# Altium PCB UC-523.PcbDoc (part 1 of 2)
Units mil, origin at the board's own origin, x right, y up, seen from the top; angles counter-clockwise.
Board outline 3149.61 x 3149.61 mil, 2 copper layers (Top Layer, Bottom Layer); 795 components, 348 nets, 3091 pads, 29 vias.
Unrouted connection lines stored in the file: 1727.
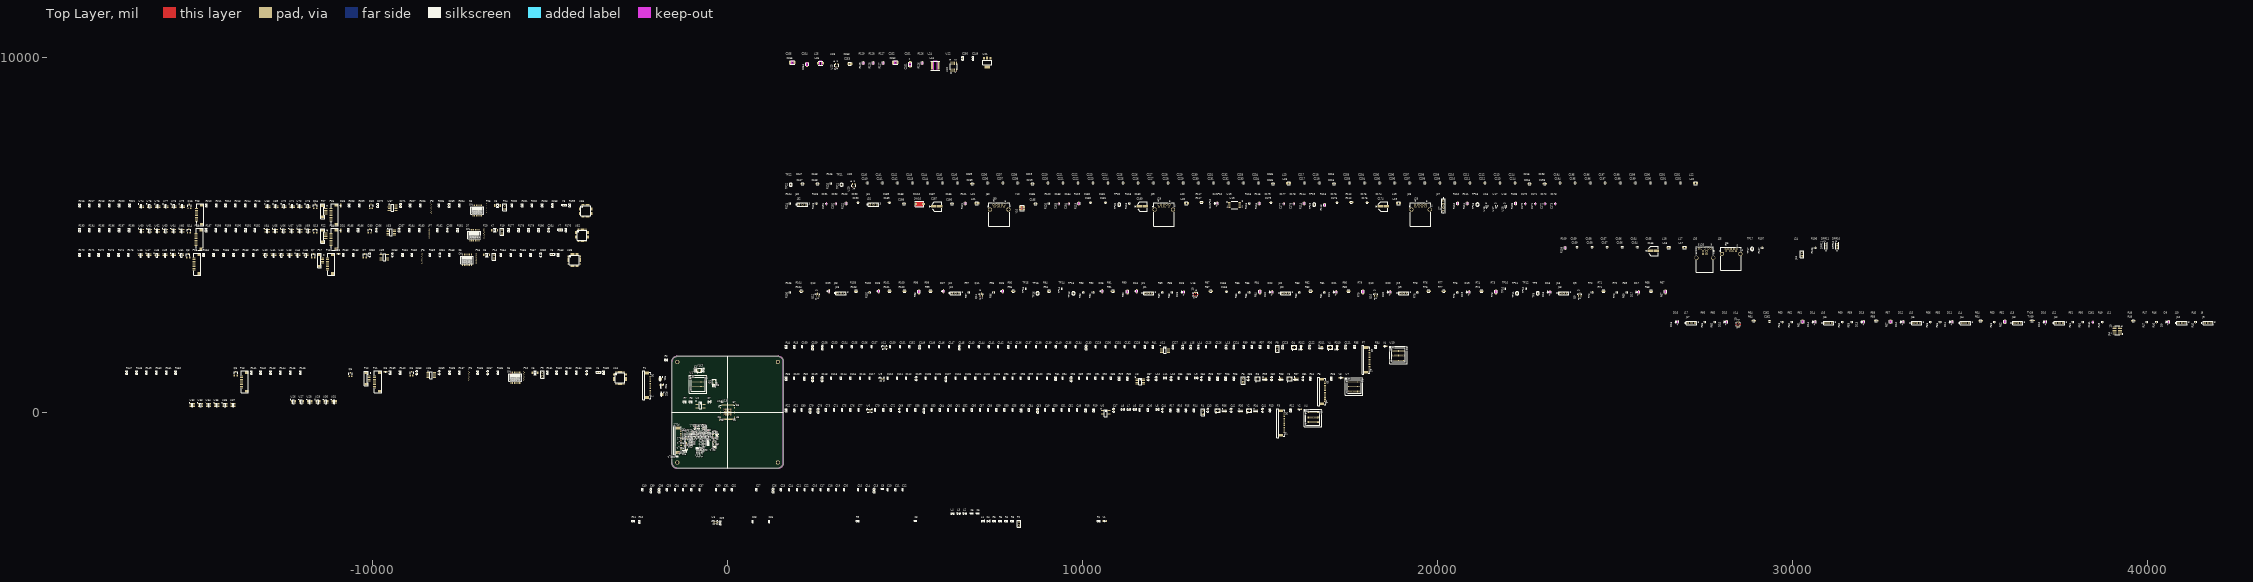
[diagram p0: Top Layer view]
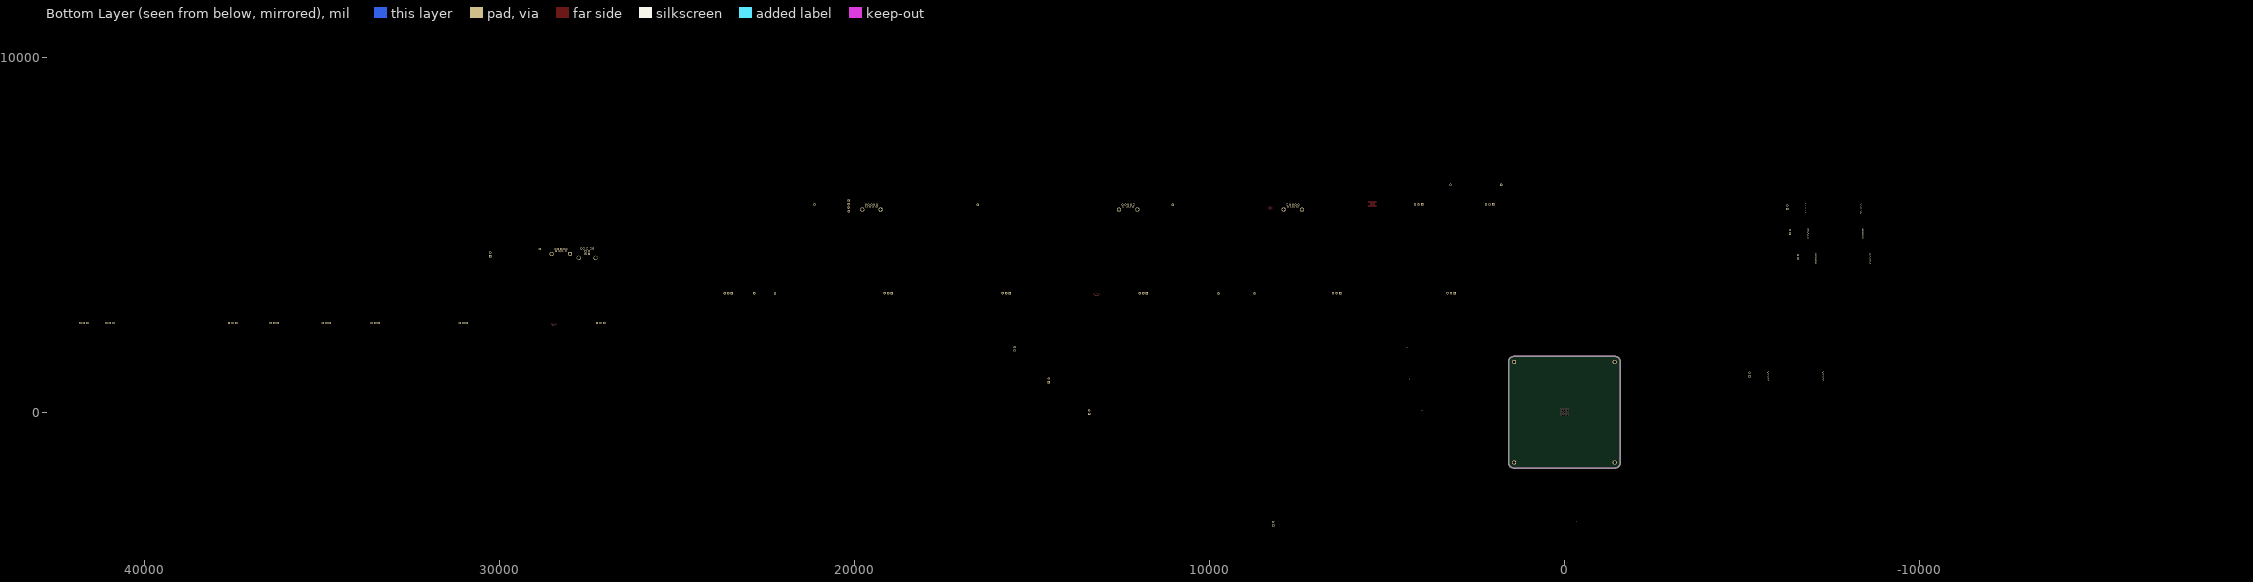
[diagram p1: Bottom Layer view, seen from below]

## Layer stack, top to bottom
Top Layer: signal copper 1.4
Dielectric: dielectric 12.6, FR-4, Dk 4.8
Bottom Layer: signal copper 1.4

## Board outline
-1574.8,-1417.32 -1574.8,1417.32 cw(c-1417.32,1417.32) -1417.32,1574.8 1417.32,1574.8 cw(c1417.32,1417.32) 1574.8,1417.32 1574.8,-1417.32 cw(c1417.32,-1417.32) 1417.32,-1574.8 -1417.32,-1574.8 cw(c-1417.32,-1417.32)

## Design rules (kind name [scope] priority, off if disabled: settings)
Clearance [All] p1: gap=7
DiffPairsRouting [All] p1: maxlimit=10 minlimit=10 mostfreqgap=10 maxuncoupledlength=500
PolygonConnect [All] p1: connectstyle=Relief reliefconductorwidth=10 reliefentries=4 polygonreliefangle="90 Angle"
RoutingVias [All] p1: holewidth=28 width=50 viastyle="Through Hole" minholewidth=28 minwidth=50 maxholewidth=28 maxwidth=50
SilkscreenOverComponentPads [All] p1: minsilkscreentomaskgap=10
SolderMaskExpansion [All] p1: expansion=4
Width [All] p1: maxlimit=10 minlimit=10 preferedwidth=10
26 further rules are at their usual default settings.

## Classes and differential pairs
component class "LED_Driver - 4": C256 C257 C258 C259 C268 C269 C270 C271 D28 D29 D32 D33 JP4 JP8 K4 K8 P24 P25 P26 P27 P28 Q11 Q12 Q15 Q16 R187 R188 R189 R190 R191 R192 R193 R194 R195 R196 R197 R198 R199 R200 R201 R202 R203 R204 R205 R206 R207 R208 R209 R210 R211 R212 R213 R214 R215 R216 R217 R218 R219 R220 R221 S4 S8 U66 U67 U68 U69 U70 U71 U72 U73 U74 U75 U76 U77 U78 U79 Y8 Y9
component class "LED_Driver - 3": C252 C253 C254 C255 C264 C265 C266 C267 D26 D27 D30 D31 JP3 JP7 K3 K7 P19 P20 P21 P22 P23 Q9 Q10 Q13 Q14 R164 R165 R166 R167 R168 R169 R170 R171 R172 R173 R174 R175 R176 R177 R178 R179 R180 R181 R182 R183 R184 R185 R186 R187 R188 R189 R190 R191 R192 R193 R194 R195 R196 R197 R198 S3 S7 U52 U53 U54 U55 U56 U57 U58 U59 U60 U61 U62 U63 U64 U65 Y7 Y8
component class "LED_Driver - 2": C248 C249 C250 C251 C260 C261 C262 C263 D7 D8 D24 D25 JP2 JP6 K2 K6 P14 P15 P16 P17 P18 Q7 Q8 R141 R142 R143 R144 R145 R146 R147 R148 R149 R150 R151 R152 R153 R154 R155 R156 R157 R158 R159 R160 R161 R162 R163 R164 R165 R166 R167 R168 R169 R170 R171 R172 R173 R174 R175 S2 S6 U38 U39 U40 U41 U42 U43 U44 U45 U46 U47 U48 U49 U50 U51 Y6 Y7
component class "LED_Driver - 1": C244 C245 C246 C247 C256 C257 C258 C259 D5 D6 D22 D23 JP1 JP5 K1 K5 P9 P10 P11 P12 P13 Q5 Q6 R118 R119 R120 R121 R122 R123 R124 R125 R126 R127 R128 R129 R130 R131 R132 R133 R134 R135 R136 R137 R138 R139 R140 R141 R142 R143 R144 R145 R146 R147 R148 R149 R150 R151 R152 S1 S5 U24 U25 U26 U27 U28 U29 U30 U31 U32 U33 U34 U35 U36 U37 Y5 Y6
component class "Cyusb3014 - 1": C1 C2 C3 C4 C5 C6 C7 C8 C9 C10 C11 C12 C13 C14 C15 C16 C17 C18 C19 C20 C21 C22 C23 C24 C25 C26 C27 C28 C29 C30 C31 C32 C33 C34 C35 C36 C37 C38 C39 C40 G1 L1 L2 L3 L4 P1 P2 R1 R2 R3 R4 R5 R6 R7 R8 R9 R10 R11 RS1 RS2 RS3 U1 U2 U3 V1 Y1
component class "Cyusb3014 - 2": C38 C39 C40 C41 C42 C43 C44 C45 C46 C47 C48 C49 C50 C51 C52 C53 C54 C55 C56 C57 C58 C59 C60 C61 C62 C63 C64 C65 C66 C67 C68 C69 C70 C71 C72 C73 C74 C75 C76 C77 C78 C79 C80 G2 L5 L6 L7 L8 P3 P4 R9 R10 R11 R12 R13 R14 R15 R16 R17 R18 R19 R20 R21 R22 RS4 RS5 RS6 U4 U5 U6 V2 Y2
component class "Cyusb3014 - 3": C75 C76 C77 C78 C79 C80 C81 C82 C83 C84 C85 C86 C87 C88 C89 C90 C91 C92 C93 C94 C95 C96 C97 C98 C99 C100 C101 C102 C103 C104 C105 C106 C107 C108 C109 C110 C111 C112 C113 C114 C115 C116 C117 C118 C119 C120 G3 L9 L10 L11 L12 P5 P6 R17 R18 R19 R20 R21 R22 R23 R24 R25 R26 R27 R28 R29 R30 R31 R32 R33 RS7 RS8 RS9 U7 U8 U9 V3 Y3
component class "Cyusb3014 - 4": C112 C113 C114 C115 C116 C117 C118 C119 C120 C121 C122 C123 C124 C125 C126 C127 C128 C129 C130 C131 C132 C133 C134 C135 C136 C137 C138 C139 C140 C141 C142 C143 C144 C145 C146 C147 C148 C149 C150 C151 C152 C153 C154 C155 C156 C157 C158 C159 C160 G4 L13 L14 L15 L16 P7 P8 R25 R26 R27 R28 R29 R30 R31 R32 R34 R35 R36 R37 R38 R39 R40 R41 R42 R43 R44 RS10 RS11 RS12 U10 U11 U12 V4 Y4
component class Cyusb3314_Indicator: C149 C150 C151 C161 C162 C163 D1 D2 D3 D4 D5 D6 D7 D8 D9 D10 D11 D12 D13 D14 D15 D16 D17 D18 D19 D20 D21 D22 D23 D24 D25 D26 D27 D28 D29 J1 J2 J3 J4 J5 J6 J7 J8 J9 J10 J11 J12 J13 J14 J15 J16 J17 J18 J19 J20 J21 J22 J23 Q1 Q2 Q3 Q4 Q9 Q10 Q11 Q12 R33 R34 R35 R36 R37 R38 R39 R40 R41 R42 R43 R44 R45 R46 R47 R48 R49 R50 R51 R52 R53 R54 R55 R56 R57 R58 R59 R60 R61 R62 R63 R64 R65 R66 R67 R68 R69 R70 R71 R72 R73 R74 R75 R76 R77 R78 R79 R80 R81 R82 R83 R84 R85 R86 R87 R88 R89 R90 R91 R92 R93 R94 R95 R96 R97 R98 R99 R100 R101 R102 R103 R104 R105 TP1 TP2 TP3 TP4 TP5 TP6 TP7 TP8 TP9 TP10 TP11 TP12 TP13 TP14 TP15 TP16 TVS1 TVS9 U14 U15
component class Cyusb3314_Interface: C152 C153 C154 C155 C156 C157 C158 C159 C160 C161 C162 C163 C164 C165 C166 C167 C168 C169 C170 C171 C172 C173 C174 C175 C176 C177 C178 C179 C180 C181 C182 C183 C184 C185 C186 C187 C188 C189 C190 C191 C192 DPR1 DPR2 DPR10 DPR11 J16 J17 J18 J19 J20 J21 J22 J23 J24 J25 J26 J27 J28 J29 J30 J31 J32 L17 L18 L19 L20 L21 R94 R95 R96 R97 R98 R99 R100 R101 R102 R103 R104 R105 R106 R107 R108 R109 R110 R111 R112 R113 R114 R115 R116 R117 R118 R119 R120 R121 R122 R123 R124 SUSP1 SUSP10 SW1 SW10 TP9 TP10 TP11 TP12 TP17 TP18 TP19 TP20 U13 U16 U17 U18 U19 U25 Y5 Y10
component class Cyusb3314_Power: C181 C182 C183 C184 C185 C186 C187 C188 C189 C190 C191 C192 C193 C194 C195 C196 C197 C198 C199 C200 C201 C202 C203 C204 C205 C206 C207 C208 C209 C210 C211 C212 C213 C214 C215 C216 C217 C218 C219 C220 C221 C222 C223 C224 C225 C226 C227 C228 C229 C230 C231 C232 C233 C234 C235 C236 C237 C238 C239 C240 C241 C242 C243 C244 C245 C246 C247 C248 L22 L23 R113 R125 TP13 TP14 TP21 TP22 U20 U32
component class Power: C237 C238 C239 C240 C241 C242 C243 C249 C250 C251 C252 C253 C254 C255 C256 C257 C258 C259 L24 L25 R114 R115 R116 R117 R126 R127 R128 R129 R206 R207 R208 R209 U21 U22 U23 U89 U90 U91
differential pair SST: +SST_P -SST_N

## Components (designator, comment, footprint, x,y, rotation, side; value= is the part's Value field where it differs from the comment)
C1 "12pF" 0603S-CAP -677,1187.41 r90 top
C1_1 "12pF" 0603S-CAP -282.4,-658.4 r270 top (schematic designator C1)
C2 "12pF" 0603S-CAP -913,1189.59 r270 top
C2_1 "12pF" 0603S-CAP -374.4,-543.4 r180 top (schematic designator C2)
C3 "0.1u" 0603S-CAP -379.59,745 r0 top
C3_1 "0.1u" 0603S-CAP -369.4,-988.4 r0 top (schematic designator C3)
C4 "0.1u" 0603S-CAP 7350,-3065 r0 top
C5 "0.1u" C0402 6879,-2847 r0 top
C6 "0.01u" C0402 7049,-2847 r0 top
C7 "0.1uF" 0603S-CAP -511,298 r0 top
C8 "0.1u" C0402 5300,-3055 r0 top
C9 "0.01u" C0402 4363,-2159 r0 top
C9_1 "0.1u" C0402 -833.4,-601.4 r180 top (schematic designator C9)
C10 "0.01u" C0402 4513,-2179 r90 top
C10_1 "0.01u" C0402 -833.4,-645.4 r180 top (schematic designator C10)
C11 "0.01u" C0402 4733,-2179 r90 top
C12 "0.01u" C0402 4933,-2179 r90 top
C13 "2.2u" C0805S-CAP 4133,-2209 r90 top
C14 "0.1u" C0402 3903,-2179 r90 top
C15 "0.01u" C0402 3683,-2179 r90 top
C15_1 "0.1u" C0402 -551.4,-790.9 r0 top (schematic designator C15)
C16 "0.01u" C0402 2403,-2179 r90 top
C16_1 "0.01u" C0402 -1024.4,-688.73 r180 top (schematic designator C16)
C17 "0.01u" C0402 2623,-2179 r90 top
C17_1 "0.1u" C0402 -1024.4,-872.07 r180 top (schematic designator C17)
C18 "0.01u" C0402 2843,-2179 r90 top
C18_1 "0.01u" C0402 -507.4,-645.4 r0 top (schematic designator C18)
C19 "0.01u" C0402 3063,-2179 r90 top
C19_1 "0.1u" C0402 -829.4,-1026.4 r270 top (schematic designator C19)
C20 "0.01u" C0402 3283,-2179 r90 top
C20_1 "0.01u" C0402 -1426.4,-1242.4 r180 top (schematic designator C20)
C21 "0.1u" C0402 1963,-2179 r90 top
C21_1 "2.2u" C0805S-CAP -943.4,-544.4 r180 top (schematic designator C21)
C22 "0.1u" C0402 2173,-2179 r90 top
C22_1 "22u" C0805S-CAP -577.4,-522.4 r0 top (schematic designator C22)
C23 "0.1u" C0402 1503,-2179 r90 top
C23_1 "22u" C0805S-CAP -718.4,-577.4 r0 top (schematic designator C23)
C24 "0.1u" C0402 1733,-2179 r90 top
C24_1 "0.1u" C0402 -924.4,-601.4 r180 top (schematic designator C24)
C25 "0.1u" C0402 1170,-3075 r90 top
C25_1 "0.1u" C0402 -602.4,-575.4 r0 top (schematic designator C25)
C26 "22u" C0805S-CAP 1283,-2209 r90 top
C26_1 "0.1u" C0402 -746.4,-645.4 r0 top (schematic designator C26)
C27 "0.1u" C0402 813,-2179 r90 top
C27_1 "0.1u" C0402 -1024.4,-732.07 r180 top (schematic designator C27)
C28 "0.1u" C0402 710,-3075 r90 top
C28_1 "0.01u" C0402 -551.4,-737.4 r0 top (schematic designator C28)
C29 "0.1u" 0603S-CAP -205,-3119 r90 top
C29_1 "0.1u" C0402 -1024.4,-828.73 r180 top (schematic designator C29)
C30 "0.1u" C0402 -317,-2179 r90 top
C30_1 "0.01u" C0402 -551.4,-833.4 r0 top (schematic designator C30)
C31 "0.1u" C0402 -87,-2179 r90 top
C31_1 "0.1u" C0402 -641.4,-737.4 r180 top (schematic designator C31)
C32 "0.1u" C0402 123,-2179 r90 top
C32_1 "0.01u" C0402 -870.4,-1026.4 r270 top (schematic designator C32)
C33 "0.1u" C0402 -1707,-2179 r90 top
C34 "0.1u" C0402 -1477,-2179 r90 top
C35 "0.1u" C0402 -1247,-2179 r90 top
C36 "0.1u" C0402 -1017,-2179 r90 top
C36_1 "22u" C0805S-CAP -685.4,-1044.4 r270 top (schematic designator C36)
C37 "0.1u" C0402 -787,-2179 r90 top
C37_1 "0.1u" C0402 -738.4,-1026.4 r270 top (schematic designator C37)
C38 "22u" C0805S-CAP -1927,-2209 r90 top
C38_1 "0.01u" C0402 -1024.4,-915.4 r180 top (schematic designator C38)
C39 "22u" C0805S-CAP -2157,-2209 r90 top
C39_1 "0.1u" C0402 -551.4,-918.4 r0 top (schematic designator C39)
C40 "0.1u" C0402 -2397,-2179 r90 top
C40_1 "0.01u" C0402 -659.4,-645.4 r0 top (schematic designator C40)
C41 "12pF" 0603S-CAP 15075,55 r90 top
C41_1 "0.1u" C0402 -779.4,-1026.4 r270 top (schematic designator C41)
C42 "12pF" 0603S-CAP 14190,55 r90 top
C42_1 "0.1u" C0402 -1024.4,-645.4 r180 top (schematic designator C42)
C43 "0.1u" 0603S-CAP 13535,55 r90 top
C43_1 "0.1u" C0402 -924.4,-645.4 r0 top (schematic designator C43)
C44 "0.1u" 0603S-CAP 12255,55 r90 top
C44_1 "0.01u" C0402 -1024.4,-601.4 r180 top (schematic designator C44)
C45 "0.1u" C0402 11615,70 r90 top
C45_1 "0.1u" C0402 -507.4,-601.4 r0 top (schematic designator C45)
C46 "0.01u" C0402 11845,70 r90 top
C46_1 "0.01u" C0402 -551.4,-875.9 r0 top (schematic designator C46)
C47 "0.1uF" 0603S-CAP 10880,55 r90 top
C47_1 "0.1u" C0402 -1024.4,-785.4 r180 top (schematic designator C47)
C48 "0.1u" C0402 9855,70 r90 top
C49 "0.01u" C0402 8955,70 r90 top
C50 "0.01u" C0402 9185,70 r90 top
C51 "0.01u" C0402 9415,70 r90 top
C52 "0.01u" C0402 9625,70 r90 top
C53 "2.2u" C0805S-CAP 8735,40 r90 top
C54 "0.1u" C0402 8495,70 r90 top
C55 "0.01u" C0402 8035,70 r90 top
C56 "0.01u" C0402 6885,70 r90 top
C57 "0.01u" C0402 7115,70 r90 top
C58 "0.01u" C0402 7345,70 r90 top
C59 "0.01u" C0402 7575,70 r90 top
C60 "0.01u" C0402 7805,70 r90 top
C61 "0.1u" C0402 6445,70 r90 top
C62 "0.1u" C0402 6655,70 r90 top
C63 "0.1u" C0402 5755,70 r90 top
C64 "0.1u" C0402 5985,70 r90 top
C65 "0.1u" C0402 6215,70 r90 top
C66 "22u" C0805S-CAP 5535,40 r90 top
C67 "0.1u" C0402 5065,70 r90 top
C68 "0.1u" C0402 5295,70 r90 top
C69 "0.1u" 0603S-CAP 4845,55 r90 top
C70 "0.1u" C0402 4165,70 r90 top
C71 "0.1u" C0402 4395,70 r90 top
C72 "0.1u" C0402 4605,70 r90 top
C73 "0.1u" C0402 2775,70 r90 top
C74 "0.1u" C0402 3005,70 r90 top
C75 "0.1u" C0402 3235,70 r90 top
C76 "0.1u" C0402 3465,70 r90 top
C77 "0.1u" C0402 3695,70 r90 top
C78 "22u" C0805S-CAP 2555,40 r90 top
C79 "22u" C0805S-CAP 2325,40 r90 top
C80 "0.1u" C0402 2085,70 r90 top
C81 "12pF" 0603S-CAP 16215,945 r90 top
C82 "12pF" 0603S-CAP 15330,945 r90 top
C83 "0.1u" 0603S-CAP 14675,945 r90 top
C84 "0.1u" 0603S-CAP 13355,945 r90 top
C85 "0.1u" C0402 12715,960 r90 top
C86 "0.01u" C0402 12945,960 r90 top
C87 "0.1uF" 0603S-CAP 11850,945 r90 top
C88 "0.1u" C0402 10805,960 r90 top
C89 "0.01u" C0402 9905,960 r90 top
C90 "0.01u" C0402 10135,960 r90 top
C91 "0.01u" C0402 10365,960 r90 top
C92 "0.01u" C0402 10575,960 r90 top
C93 "2.2u" C0805S-CAP 9685,930 r90 top
C94 "0.1u" C0402 9445,960 r90 top
C95 "0.01u" C0402 9005,960 r90 top
C96 "0.01u" C0402 7805,960 r90 top
C97 "0.01u" C0402 8035,960 r90 top
C98 "0.01u" C0402 8265,960 r90 top
C99 "0.01u" C0402 8495,960 r90 top
C100 "0.01u" C0402 8725,960 r90 top
C101 "0.1u" C0402 6985,960 r90 top
C102 "0.1u" C0402 7245,960 r90 top
C103 "0.1u" C0402 7525,960 r90 top
C104 "0.1u" C0402 6425,960 r90 top
C105 "0.1u" C0402 6705,960 r90 top
C106 "0.1u" C0402 5865,960 r90 top
C107 "22u" C0805S-CAP 6155,930 r90 top
C108 "0.1u" C0402 5585,960 r90 top
C109 "0.1u" 0603S-CAP 5315,945 r90 top
C110 "0.1u" C0402 4515,960 r90 top
C111 "0.1u" C0402 4785,960 r90 top
C112 "0.1u" C0402 5035,960 r90 top
C113 "0.1u" C0402 2925,960 r90 top
C114 "0.1u" C0402 3195,960 r90 top
C115 "0.1u" C0402 3465,960 r90 top
C116 "0.1u" C0402 3735,960 r90 top
C117 "0.1u" C0402 4005,960 r90 top
C118 "22u" C0805S-CAP 2665,930 r90 top
C119 "22u" C0805S-CAP 2395,930 r90 top
C120 "0.1u" C0402 1875,960 r90 top
C121 "12pF" 0603S-CAP 17415,1835 r90 top
C122 "12pF" 0603S-CAP 16400,1835 r90 top
C123 "0.1u" 0603S-CAP 15645,1835 r90 top
C124 "0.1u" 0603S-CAP 14270,1835 r90 top
C125 "0.1u" C0402 13485,1850 r90 top
C126 "0.01u" C0402 13765,1850 r90 top
C127 "0.1uF" 0603S-CAP 12550,1835 r90 top
C128 "0.1u" C0402 11475,1850 r90 top
C129 "0.01u" C0402 10375,1850 r90 top
C130 "0.01u" C0402 10655,1850 r90 top
C131 "0.01u" C0402 10935,1850 r90 top
C132 "0.01u" C0402 11195,1850 r90 top
C133 "2.2u" C0805S-CAP 10105,1820 r90 top
C134 "0.1u" C0402 9815,1850 r90 top
C135 "0.01u" C0402 9535,1850 r90 top
C136 "0.01u" C0402 8135,1850 r90 top
C137 "0.01u" C0402 8415,1850 r90 top
C138 "0.01u" C0402 8695,1850 r90 top
C139 "0.01u" C0402 8975,1850 r90 top
C140 "0.01u" C0402 9255,1850 r90 top
C141 "0.1u" C0402 7365,1850 r90 top
C142 "0.1u" C0402 7625,1850 r90 top
C143 "0.1u" C0402 6805,1850 r90 top
C144 "0.1u" C0402 7085,1850 r90 top
C145 "22u" C0805S-CAP 6535,1820 r90 top
C146 "0.1u" C0402 5965,1850 r90 top
C147 "0.1u" C0402 6245,1850 r90 top
C148 "0.1u" C0402 5685,1850 r90 top
C149 "0.1u" 0603S-CAP 5415,1835 r90 top
C150 "0.1u" C0402 4585,1850 r90 top
C151 "0.1u" C0402 4865,1850 r90 top
C152 "0.1u" C0402 5125,1850 r90 top
C153 "0.1u" C0402 2945,1850 r90 top
C154 "0.1u" C0402 3225,1850 r90 top
C155 "0.1u" C0402 3505,1850 r90 top
C156 "0.1u" C0402 3785,1850 r90 top
C157 "0.1u" C0402 4065,1850 r90 top
C158 "22u" C0805S-CAP 2675,1820 r90 top
C159 "22u" C0805S-CAP 2395,1820 r90 top
C160 "0.1u" C0402 2105,1850 r90 top
C161 "0.1UF_16V" CAPC1005X55M 38470,2535 r90 top
C162 "0.1UF_16V" CAPC1005X56M 29360,2565 r0 top
C163 "0.1UF_16V" CAPC1005X56M 14060,3405 r0 top
C164 "1.0uF_16V" CAPC1005X56M 25635,4655 r0 top
C165 "150uF_16V" CAPAE660X800M 26085,4550 r0 top
C166 "0.1UF_16V" CAPC1005X56M 25210,4655 r0 top
C167 "0.1UF_16V" CAPC1005X56M 24785,4655 r0 top
C168 "0.1UF_16V" CAPC1005X56M 24360,4655 r0 top
C169 "0.1UF_16V" CAPC1005X56M 23935,4655 r0 top
C170 "0.01UF_35V" CAPC1005X55M 22485,5875 r90 top
C171 "0.1UF_35V" CAPC1005X55M 22765,5875 r90 top
C172 "0.1UF_35V" CAPC1005X55M 23040,5875 r90 top
C173 "0.01UF_35V" CAPC1005X55M 23325,5875 r90 top
C174 "150uF_16V" CAPAE660X800M 18475,5800 r0 top
C175 "0.1UF_16V" CAPC1005X56M 18020,5905 r0 top
C176 "0.1UF_16V" CAPC1005X56M 17170,5905 r0 top
C177 "0.1UF_35V" CAPC1005X55M 15680,5875 r90 top
C178 "0.01UF_35V" CAPC1005X55M 15960,5875 r90 top
C179 "0.1UF_16V" CAPC1005X56M 15310,5905 r0 top
C180 "150uF_16V" CAPAE660X800M 11685,5800 r0 top
C181 "0.1UF_16V" CAPC1005X56M 10650,5905 r0 top
C182 "0.1UF_16V" CAPC1005X56M 10225,5905 r0 top
C183 "0.1UF_35V" CAPC1005X55M 9340,5875 r90 top
C184 "0.01UF_35V" CAPC1005X55M 9620,5875 r90 top
C185 "10pF_16V" CAPC1608X90M 8675,5875 r0 top
C186 "10pF_16V" CAPC1608X90M 6320,5875 r0 top
C187 "150uF_16V" CAPAE660X800M 5895,5800 r0 top
C188 "1.5uF_16V" CAPC1608X90M 4970,5875 r0 top
C189 "0.1UF_16V" CAPC1005X56M 4560,5905 r0 top
C190 "0.1UF_16V" CAPC1005X56M 3675,5905 r0 top
C191 "0.1UF_35V" CAPC1005X55M 2785,5875 r90 top
C192 "0.01UF_35V" CAPC1005X55M 3060,5875 r90 top
C193 "10UF_10V" CAPC1608X90M 23025,6435 r0 top
C194 "1UF_10V" CAPC1005X56M 23460,6465 r0 top
C195 "0.1UF_10V" CAPC1005X56M 23885,6465 r0 top
C196 "0.01UF_10V" CAPC1005X56M 24310,6465 r0 top
C197 "0.01UF_10V" CAPC1005X56M 24730,6465 r0 top
C198 "0.1UF_10V" CAPC1005X56M 25155,6465 r0 top
C199 "0.01UF_10V" CAPC1005X56M 25580,6465 r0 top
C200 "0.1UF_10V" CAPC1005X56M 26005,6465 r0 top
C201 "0.01UF_10V" CAPC1005X56M 26430,6465 r0 top
C202 "0.1UF_10V" CAPC1005X56M 26850,6465 r0 top
C203 "0.001UF_10V" CAPC1005X56M 17525,6465 r0 top
C204 "0.01UF_10V" CAPC1005X56M 17950,6465 r0 top
C205 "0.001UF_10V" CAPC1005X56M 18375,6465 r0 top
C206 "0.01UF_10V" CAPC1005X56M 18795,6465 r0 top
C207 "0.001UF_10V" CAPC1005X56M 19220,6465 r0 top
C208 "0.01UF_10V" CAPC1005X56M 19645,6465 r0 top
C209 "0.001UF_10V" CAPC1005X56M 20070,6465 r0 top
C210 "0.01UF_10V" CAPC1005X56M 20490,6465 r0 top
C211 "0.001UF_10V" CAPC1005X56M 20915,6465 r0 top
C212 "0.01UF_10V" CAPC1005X56M 21340,6465 r0 top
C213 "0.1UF_10V" CAPC1005X56M 21765,6465 r0 top
C214 "1UF_10V" CAPC1005X56M 22190,6465 r0 top
C215 "22uF_10V" CAPC1608X90M 22600,6435 r0 top
C216 "10uF_16V" CAPC1608X90M 17090,6435 r0 top
C217 "0.1UF_16V" CAPC1005X56M 16255,6465 r0 top
C218 "0.01UF_16V" CAPC1005X56M 16675,6465 r0 top
C219 "10uF_16V" CAPC1608X90M 8590,6435 r0 top
C220 "1.0uF_16V" CAPC1005X56M 9025,6465 r0 top
C221 "0.1UF_16V" CAPC1005X56M 9450,6465 r0 top
C222 "0.01UF_16V" CAPC1005X56M 9875,6465 r0 top
C223 "0.001UF_10V" CAPC1005X56M 10295,6465 r0 top
C224 "0.01UF_10V" CAPC1005X56M 10720,6465 r0 top
C225 "0.001UF_10V" CAPC1005X56M 11145,6465 r0 top
C226 "0.01UF_10V" CAPC1005X56M 11570,6465 r0 top
C227 "0.001UF_10V" CAPC1005X56M 11995,6465 r0 top
C228 "0.01UF_10V" CAPC1005X56M 12415,6465 r0 top
C229 "0.001UF_10V" CAPC1005X56M 12840,6465 r0 top
C230 "0.01UF_10V" CAPC1005X56M 13265,6465 r0 top
C231 "0.001UF_10V" CAPC1005X56M 13690,6465 r0 top
C232 "0.01UF_10V" CAPC1005X56M 14110,6465 r0 top
C233 "0.1UF_10V" CAPC1005X56M 14535,6465 r0 top
C234 "1UF_10V" CAPC1005X56M 14960,6465 r0 top
C235 "22uF_10V" CAPC1608X90M 15370,6435 r0 top
C236 "0.1UF_10V" CAPC1005X56M 7330,6465 r0 top
C237 "0.01UF_10V" CAPC1005X56M 7755,6465 r0 top
C238 "1UF_10V" CAPC1005X56M 8175,6465 r0 top
C239 "10uF_16V" CAPC1608X90M 6895,6435 r0 top
C240 "1.0uF_16V" CAPC1005X56M 3940,6465 r0 top
C241 "0.1UF_16V" CAPC1005X56M 4360,6465 r0 top
C242 "0.01UF_16V" CAPC1005X56M 4785,6465 r0 top
C243 "0.01UF_16V" CAPC1005X56M 5210,6465 r0 top
C244 "0.1UF_16V" CAPC1005X56M 5635,6465 r0 top
C245 "0.01UF_16V" CAPC1005X56M 6055,6465 r0 top
C246 "0.1UF_16V" CAPC1005X56M 6480,6465 r0 top
C247 "1.0uF_16V" CAPC1608X90M 2110,6435 r0 top
C248 "1.0uF_16V" CAPC1608X90M 2535,6435 r0 top
C249 "1u" C0603 6915,9970 r90 top
C250 "0.1u" C0603 6625,9970 r90 top
C251 "22uF_16V" CAPCP3216X100M 5145,9800 r90 top
C252 "22uF_10V" CAPC3216X100M 4725,9855 r0 top
C253 "2.2nF" CAPC2112X70M 3445,9820 r0 top
C254 "10UF_10V" CAPC2012X145M 2240,9800 r90 top
C255 "22uF_6.3V" CAPC3216X100M 1825,9855 r0 top
C256 "0.1uF" C0603 -3972,1113 r90 top
C257 "0.1uF" C0603 -6762,1113 r90 top
C258 "0.1uF" C0603 -8762,1113 r90 top
C259 "0.1u" C0603 -8122,1113 r90 top
C260 "0.1uF" C0603 -5264,4435 r90 top
C261 "0.1uF" C0603 -8104,4435 r90 top
C262 "0.1uF" C0603 -10084,4435 r90 top
C263 "0.1u" C0603 -9444,4435 r90 top
C264 "0.1uF" C0603 -5044,5130 r90 top
C265 "0.1uF" C0603 -7894,5130 r90 top
C266 "0.1uF" C0603 -9894,5130 r90 top
C267 "0.1u" C0603 -9254,5130 r90 top
C268 "0.1uF" C0603 -4934,5825 r90 top
C269 "0.1uF" C0603 -7844,5825 r90 top
C270 "0.1uF" C0603 -9854,5825 r90 top
C271 "0.1u" C0603 -9214,5825 r90 top
D5 "SM712" SOT23-3 -8907,1088 r0 top
D6 "GREEN" LED0805 -9642,1143 r0 top
D7 "SM712" SOT23-3 -10224,4410 r0 top
D8 "GREEN" LED0805 -10959,4465 r0 top
D9 "HSMA-C190" LEDC1608X80M 40605,2540 r90 top
D10 "LTST-C190KGKT" LEDC1608X80M 37150,2540 r90 top
D11 "LTST-C190KGKT" LEDC1608X80M 34505,2540 r90 top
D12 "HSMA-C190" LEDC1608X80M 33125,2540 r90 top
D13 "HSMA-C190" LEDC1608X80M 32020,2540 r90 top
D14 "LTST-C190KGKT" LEDC1608X80M 30645,2540 r90 top
D15 "LTST-C190KGKT" LEDC1608X80M 28155,2540 r90 top
D16 "LTST-C190KGKT" LEDC1608X80M 26780,2540 r90 top
D17 "LTST-C190KGKT" LEDC1608X80M 25675,3380 r90 top
D18 "LTST-C190KGKT" LEDC1608X80M 23175,3380 r90 top
D19 "LTST-C190KGKT" LEDC1608X80M 20900,3380 r90 top
D20 "HSMA-C190" LEDC1608X80M 18675,3380 r90 top
D21 "HSMA-C190" LEDC1608X80M 17150,3380 r90 top
D22 "HSMA-C190" LEDC1608X80M 15350,3380 r90 top
D23 "HSMA-C190" LEDC1608X80M 12860,3380 r90 top
D24 "LTST-C193TBKT-5A" LEDC1608X35M 11530,3410 r90 top
D25 "LTST-C193TBKT-5A" LEDC1608X35M 10555,3410 r90 top
D26 "LTST-C193TBKT-5A" LEDC1608X35M 7750,3410 r90 top
D27 "LTST-C193TBKT-5A" LEDC1608X35M 6085,3410 r90 top
D28 "LTST-C193TBKT-5A" LEDC1608X35M 4260,3410 r90 top
D29 "LTST-C193TBKT-5A" LEDC1608X35M 2860,3410 r90 top
D30 "SM712" SOT23-3 -10089,5105 r0 top
D31 "GREEN" LED0805 -10899,5125 r90 top
D32 "SM712" SOT23-3 -10049,5800 r0 top
D33 "GREEN" LED0805 -10899,5820 r90 top
DPR10 "0R_0603" RC0603_3P 31270,4685 r90 top
DPR11 "0R_0603" RC0603_3P 30950,4685 r90 top
G1 "32.768KHz" 爱普生晶振3.2×2.5mm -376,864 r90 top
G1_1 "32.768KHz" 爱普生晶振3.2×2.5MM -369.4,-873.4 r90 top (schematic designator G1)
G2 "32.768KHz" 爱普生晶振3.2×2.5mm 13810,50 r0 top
G3 "32.768KHz" 爱普生晶振3.2×2.5mm 14945,940 r0 top
G4 "32.768KHz" 爱普生晶振3.2×2.5mm 15965,1830 r0 top
J9 "3PIN JUMPER" TE_3-644456-3 41620,2515 r0 top
J10 "3PIN JUMPER" TE_3-644456-3 40885,2515 r0 top
J11 "50MIL KEYED SMD_NL" SAMTEC_FTSH-105-01-L-DV-K 39240,2205 r90 top
J12 "3PIN JUMPER" TE_3-644456-3 37430,2515 r0 top
J13 "3PIN JUMPER" TE_3-644456-3 36255,2515 r0 top
J14 "3PIN JUMPER" TE_3-644456-3 34785,2515 r0 top
J15 "3PIN JUMPER" TE_3-644456-3 33410,2515 r0 top
J16 "3PIN JUMPER" TE_3-644456-3 30925,2515 r0 top
J17 "3PIN JUMPER" TE_3-644456-3 27060,2515 r0 top
J18 "3PIN JUMPER" TE_3-644456-3 23460,3355 r0 top
J19 "3PIN JUMPER" TE_3-644456-3 18955,3355 r0 top
J20 "3PIN JUMPER" TE_3-644456-3 15630,3355 r0 top
J21 "3PIN JUMPER" TE_3-644456-3 11765,3355 r0 top
J22 "3PIN JUMPER" TE_3-644456-3 6320,3355 r0 top
J23 "3PIN JUMPER" TE_3-644456-3 3095,3355 r0 top
J24 "HDR_1X2_NL" SAMTEC_TSW-102-08-G-S 30270,4400 r90 top
J25 "UEA1112C-4HK1-4H" FOXCONN_UEA1112C-4HK1-4H 28140,4540 r0 top
J26 "USB3_B_CONN" FOXCONN_UEB1112C-2AK1-4H 27535,4325 r0 top
J27 "HDR4X1" SAMTEC_TSW-104-08-G-S 20170,5815 r90 top
J28 "UEA1112C-4HK1-4H" FOXCONN_UEA1112C-4HK1-4H 19390,5790 r0 top
J29 "UEA1112C-4HK1-4H" FOXCONN_UEA1112C-4HK1-4H 12155,5790 r0 top
J30 "UEA1112C-4HK1-4H" FOXCONN_UEA1112C-4HK1-4H 7515,5790 r0 top
J31 "3PIN JUMPER" TE_3-644456-3 4010,5855 r0 top
J32 "3PIN JUMPER" TE_3-644456-3 2010,5855 r0 top
JP5 "Header 3X2" MHDR1X6 -7277,893 r90 top
JP6 "Header 3X2" MHDR1X6 -8619,4215 r90 top
JP7 "Header 3X2" MHDR1X6 -8409,4910 r90 top
JP8 "Header 3X2" MHDR1X6 -8369,5605 r90 top
K5 "SW-PB" 157SW -5347,1113 r0 top
K6 "SW-PB" 157SW -6709,4435 r0 top
K7 "SW-PB" 157SW -6484,5130 r0 top
K8 "SW-PB" 157SW -6404,5825 r0 top
L1 "磁珠" L0603 7195,-3065 r0 top
L1_1 "磁珠" L0603 -815.4,-432.4 r90 top (schematic designator L1)
L2 "磁珠" L0603 6682,-2853 r0 top
L3 "磁珠" L0603 6512,-2853 r0 top
L3_1 "磁珠" L0603 -911.4,-432.4 r270 top (schematic designator L3)
L4 "磁珠" L0603 6337,-2853 r0 top
L4_1 "磁珠" L0603 -609.4,-432.4 r270 top (schematic designator L4)
L5 "磁珠" L0603 12110,80 r0 top
L5_1 "磁珠" L0603 -688.4,-432.4 r270 top (schematic designator L5)
L6 "磁珠" L0603 11475,80 r0 top
L7 "磁珠" L0603 11305,80 r0 top
L8 "磁珠" L0603 11135,80 r0 top
L9 "磁珠" L0603 13205,970 r0 top
L10 "磁珠" L0603 12500,945 r90 top
L11 "磁珠" L0603 12325,970 r0 top
L12 "磁珠" L0603 12080,945 r90 top
L13 "磁珠" L0603 14050,1835 r90 top
L14 "磁珠" L0603 13270,1835 r90 top
L15 "磁珠" L0603 13050,1835 r90 top
L16 "磁珠" L0603 12830,1835 r90 top
L17 "BLM21PG221SN1D" INDC2012X105M 26965,4640 r0 top
L18 "BLM21PG221SN1D" INDC2012X105M 26520,4640 r0 top
L19 "BLM21PG221SN1D" INDC2012X105M 18905,5890 r0 top
L20 "BLM21PG221SN1D" INDC2012X105M 12930,5890 r0 top
L21 "BLM21PG221SN1D" INDC2012X105M 7025,5890 r0 top
L22 "BLM21PG221SN1D" INDC2012X105M 27275,6450 r0 top
L23 "BLM21PG221SN1D" INDC2012X105M 15810,6450 r0 top
L24 "4.7uH" IND_NR6028T4R7M 5850,9765 r0 top
L25 "2.2uH" INDP3225X240M 2615,9835 r0 top
P1 "30PIN" FH12-30S-0.5SH -2224.23,758.94 r90 top
P2 "Header 2" HDR1X2 8205,-3190 r90 top
P3 "30PIN" FH12-30S-0.5SH 15640,-305 r90 top
P3_1 "30PIN" FH12-30S-0.5SH -1359.4,-787.4 r90 top locked (schematic designator HDC1)
P4 "Header 2" HDR1X2 13390,-45 r90 top
P5 "30PIN" FH12-30S-0.5SH 16790,585 r90 top
P6 "Header 2" HDR1X2 14530,845 r90 top
P7 "30PIN" FH12-30S-0.5SH 18040,1475 r90 top
P8 "Header 2" HDR1X2 15495,1735 r90 top
P9 "Header 2" HDR1X2 -5217,1013 r90 top
P10 "FTDI Basic" MHDR1X6 -5727,893 r90 top
P11 "Header 8" SH_1.25MM*8 -9802,853 r90 top
P12 "Header 4" SMT_1.25MM*4 -10142,953 r90 top
P13 "Header 8" SH_1.25MM*8 -13552,853 r90 top
P14 "Header 2" HDR1X2 -6579,4335 r90 top
P15 "FTDI Basic" MHDR1X6 -7084,4215 r90 top
P16 "Header 8" SH_1.25MM*8 -11124,4175 r90 top
P17 "Header 4" SMT_1.25MM*4 -11459,4275 r90 top
P18 "Header 8" SH_1.25MM*8 -14889,4175 r90 top
P19 "Header 2" HDR1X2 -6359,5030 r90 top
P20 "FTDI Basic" MHDR1X6 -6874,4910 r90 top
P21 "Header 8" SH_1.25MM*8 -11024,4870 r90 top
P22 "Header 4" SMT_1.25MM*4 -11364,4970 r90 top
P23 "Header 8" SH_1.25MM*8 -14829,4870 r90 top
P24 "Header 2" HDR1X2 -6279,5725 r90 top
P25 "FTDI Basic" MHDR1X6 -6794,5605 r90 top
P26 "Header 8" SH_1.25MM*8 -11024,5565 r90 top
P27 "Header 4" SMT_1.25MM*4 -11364,5665 r90 top
P28 "Header 8" SH_1.25MM*8 -14814,5565 r90 top
Q5 "BSS138" "SOT-23 (Standard)" -10667,1011 r0 top
Q6 "BSS138" "SOT-23 (Standard)" -13897,1038 r0 top
Q7 "BSS138" "SOT-23 (Standard)" -11714,4360 r0 top
Q8 "BSS138" "SOT-23 (Standard)" -15239,4360 r0 top
Q9 "BSN20-7" SOT92P240X110-3M 24015,3305 r90 top
Q10 "BSN20-7" SOT92P240X110-3M 18265,3305 r90 top
Q11 "BSN20-7" SOT92P240X110-3M 7150,3305 r90 top
Q12 "BSN20-7" SOT92P240X110-3M 2535,3305 r90 top
Q13 "BSS138" "SOT-23 (Standard)" -11659,5055 r0 top
Q14 "BSS138" "SOT-23 (Standard)" -15219,5055 r0 top
Q15 "BSS138" "SOT-23 (Standard)" -11659,5750 r0 top
Q16 "BSS138" "SOT-23 (Standard)" -15204,5750 r0 top
R1 "10K" 0603S-RES 10455,-3065 r0 top
R2 "0" 0603S-RES -1730,1479 r0 top
R3 "4.7K" 0603S-RES 8025,-3065 r0 top
R4 "4.7K" 0603S-RES 7855,-3065 r0 top
R5 "4.7K" 0603S-RES 7685,-3065 r0 top
R6 "4.7K" 0603S-RES 7515,-3065 r0 top
R7 "4.7K" 0603S-RES -1206,298 r0 top
R8 "4.7K" 0603S-RES -1036,298 r0 top
R9 "0" 0603S-RES 3665,-3065 r0 top
R10 "6.04K-1%" 0603S-RES -2480,-3085 r90 top
R11 "200-1%" 0603S-RES -2660,-3065 r0 top
R11_1 "0" 0603S-RES -1196.4,-1100.4 r0 top (schematic designator R11)
R12 "10K" 0603S-RES 15865,60 r90 top
R13 "0" 0603S-RES 15285,60 r90 top
R14 "4.7K" 0603S-RES 13140,60 r90 top
R15 "4.7K" 0603S-RES 12920,60 r90 top
R16 "4.7K" 0603S-RES 12700,60 r90 top
R17 "4.7K" 0603S-RES 12480,60 r90 top
R18 "4.7K" 0603S-RES 10095,60 r90 top
R19 "4.7K" 0603S-RES 10315,60 r90 top
R20 "0" 0603S-RES 8275,60 r90 top
R21 "6.04K-1%" 0603S-RES 1885,60 r90 top
R22 "200-1%" 0603S-RES 1655,60 r90 top
R23 "10K" 0603S-RES 17015,950 r90 top
R24 "0" 0603S-RES 16425,950 r90 top
R25 "4.7K" 0603S-RES 14270,950 r90 top
R26 "4.7K" 0603S-RES 14040,950 r90 top
R27 "4.7K" 0603S-RES 13810,950 r90 top
R28 "4.7K" 0603S-RES 13580,950 r90 top
R29 "4.7K" 0603S-RES 11040,950 r90 top
R30 "4.7K" 0603S-RES 11270,950 r90 top
R31 "0" 0603S-RES 9245,950 r90 top
R32 "6.04K-1%" 0603S-RES 2165,950 r90 top
R33 "200-1%" 0603S-RES 1655,950 r90 top
R34 "10K" 0603S-RES 18265,1840 r90 top
R35 "0" 0603S-RES 17670,1840 r90 top
R36 "4.7K" 0603S-RES 15240,1840 r90 top
R37 "4.7K" 0603S-RES 15010,1840 r90 top
R38 "4.7K" 0603S-RES 14780,1840 r90 top
R39 "4.7K" 0603S-RES 14550,1840 r90 top
R40 "4.7K" 0603S-RES 11760,1840 r90 top
R41 "4.7K" 0603S-RES 11990,1840 r90 top
R42 "0" 0603S-RES 7915,1840 r90 top
R43 "6.04K-1%" 0603S-RES 1885,1840 r90 top
R44 "200-1%" 0603S-RES 1655,1840 r90 top
R45 "10K" RESC1005X40M 41370,2540 r90 top
R46 "10K" RESC1005X40M 40270,2540 r90 top
R47 "10K" RESC1005X40M 39995,2540 r90 top
R48 "270R" RESC1608X50M 39610,2575 r0 top
R49 "10K" RESC1005X40M 38740,2540 r90 top
R50 "10K" RESC1005X40M 38190,2540 r90 top
R51 "10K" RESC1005X40M 37915,2540 r90 top
R52 "300R" RESC2012X65M 35995,2550 r90 top
R53 "10K" RESC1005X40M 35695,2540 r90 top
R54 "225R" RESC1608X50M 35310,2575 r0 top
R55 "10K" RESC1005X40M 34170,2540 r90 top
R56 "10K" RESC1005X40M 33895,2540 r90 top
R57 "300R" RESC2012X65M 32775,2550 r90 top
R58 "270R" RESC1608X50M 32365,2575 r0 top
R59 "10K" RESC1005X40M 31685,2540 r90 top
R60 "10K" RESC1005X40M 31415,2540 r90 top
R61 "300R" RESC2012X65M 30295,2550 r90 top
R62 "10K" RESC1005X40M 29995,2540 r90 top
R63 "10K" RESC1005X40M 29720,2540 r90 top
R64 "225R" RESC1608X50M 28915,2575 r0 top
R65 "10K" RESC1005X40M 27820,2540 r90 top
R66 "10K" RESC1005X40M 27545,2540 r90 top
R67 "300R" RESC2012X65M 26430,3390 r90 top
R68 "225R" RESC1608X50M 26020,3415 r0 top
R69 "26.7K_1%" RESC1005X40M 25340,3380 r90 top
R70 "10K" RESC1005X40M 25065,3380 r90 top
R71 "100E" RESC1608X50M 24680,3415 r0 top
R72 "10K" RESC1005X40M 24365,3380 r90 top
R73 "300R" RESC2012X65M 21655,3390 r90 top
R74 "225R" RESC1608X50M 21245,3415 r0 top
R75 "10K" RESC1005X40M 20565,3380 r90 top
R76 "100E" RESC1608X50M 19755,3415 r0 top
R77 "0R" RESC1608X50M 20180,3415 r0 top
R78 "10K" RESC1005X40M 19445,3380 r90 top
R79 "300R" RESC2012X65M 17905,3390 r90 top
R80 "270R" RESC1608X50M 17495,3415 r0 top
R81 "10K" RESC1005X40M 16815,3380 r90 top
R82 "0R" RESC1608X50M 16430,3415 r0 top
R83 "10K" RESC1005X40M 16115,3380 r90 top
R84 "300R" RESC2012X65M 15000,3390 r90 top
R85 "10K" RESC1005X40M 14700,3380 r90 top
R86 "10K" RESC1005X40M 14425,3380 r90 top
R87 "270R" RESC1608X50M 13615,3415 r0 top
R88 "10K" RESC1005X40M 12525,3380 r90 top
R89 "10K" RESC1005X40M 12250,3380 r90 top
R90 "125R" RESC2012X65M 11265,3390 r90 top
R91 "225R" RESC1608X50M 10855,3415 r0 top
R92 "10K" RESC1005X40M 10305,3380 r90 top
R93 "26.7K_1%" RESC1005X40M 10030,3380 r90 top
R94 "225R" RESC1608X50M 9060,3415 r0 top
R95 "100E" RESC1608X50M 8050,3415 r0 top
R96 "10K" RESC1005X40M 7500,3380 r90 top
R97 "10K" RESC1005X40M 6805,3380 r90 top
R98 "125R" RESC2012X65M 5395,3390 r90 top
R99 "0R" RESC1608X50M 5720,3415 r0 top
R100 "225R" RESC1608X50M 4985,3415 r0 top
R101 "100E" RESC1608X50M 4560,3415 r0 top
R102 "10K" RESC1005X40M 4005,3380 r90 top
R103 "0R" RESC1608X50M 3620,3415 r0 top
R104 "225R" RESC1608X50M 2075,3415 r0 top
R105 "10K" RESC1005X40M 1755,3380 r90 top
R106 "10K" RESC1005X40M 30650,4630 r90 top
R107 "10K" RESC1005X40M 29155,4630 r90 top
R108 "1M_1%" RESC1608X55M 22210,5880 r90 top
R109 "1M_1%" RESC1608X55M 23605,4630 r90 top
R110 "2K" RESC1608X55M 20570,5880 r90 top
R111 "2K" RESC1608X55M 20845,5880 r90 top
R112 "200R_1%" RESC1608X50M 17575,5915 r0 top
R113 "6.04K_1%" RESC1608X55M_A 16825,5835 r90 top
R114 "1M_1%" RESC1608X55M 16245,5880 r90 top
R115 "10K" RESC1608X55M 14985,5880 r90 top
R116 "10K" RESC1005X40M 14705,5880 r90 top
R117 "330R_1/8W" RESC1608X50M 13350,5915 r0 top
R118 "10K_NL" RESC1005X40M 11320,5880 r90 top
R119 "1M_1%" RESC1608X55M 9900,5880 r90 top
R120 "825R" RESC1005X40M 9055,5880 r90 top
R121 "10K" RESC1608X55M 6700,5880 r90 top
R122 "1M_1%" RESC1608X55M 3345,5880 r90 top
R123 "10K" RESC1005X40M 2500,5880 r90 top
R124 "10K" RESC1005X40M 1755,5880 r90 top
R125 "1M" RESC1005X40M 2910,6440 r90 top
R126 "10K" RESC1608X55M 5485,9835 r90 top
R127 "7.5K" RESC1608X55M 4385,9835 r90 top
R128 "2.4K" RESC1608X55M 4105,9835 r90 top
R129 "7.5K" RESC1608X55M 3825,9835 r90 top
R130 "10K" R0603 -3487,1118 r90 top
R131 "10K" R0603 -5077,1118 r90 top
R132 "10K" R0603 -4817,1118 r90 top
R133 "10K" R0603 -4537,1118 r90 top
R134 "10K" R0603 -4257,1118 r90 top
R135 "10K" R0603 -6472,1118 r90 top
R136 "4.7K" R0603 -7042,1118 r90 top
R137 "120" R0603 -7552,1118 r90 top
R138 "4.7K" R0603 -7832,1118 r90 top
R139 "470" R0603 -9502,1118 r90 top
R140 "10K" R0603 -9222,1118 r90 top
R141 "5.1" R0603 -13417,1118 r90 top
R142 "5.1" R0603 -13157,1118 r90 top
R143 "5.1" R0603 -12877,1118 r90 top
R144 "5.1" R0603 -12597,1118 r90 top
R145 "5.1" R0603 -12317,1118 r90 top
R146 "5.1" R0603 -12037,1118 r90 top
R147 "5.1" R0603 -16932,1118 r90 top
R148 "5.1" R0603 -16652,1118 r90 top
R149 "5.1" R0603 -16372,1118 r90 top
R150 "5.1" R0603 -16092,1118 r90 top
R151 "5.1" R0603 -15812,1118 r90 top
R152 "5.1" R0603 -15552,1118 r90 top
R153 "10K" R0603 -4774,4440 r90 top
R154 "10K" R0603 -6384,4440 r90 top
R155 "10K" R0603 -6104,4440 r90 top
R156 "10K" R0603 -5824,4440 r90 top
R157 "10K" R0603 -5544,4440 r90 top
R158 "10K" R0603 -7834,4440 r90 top
R159 "4.7K" R0603 -8384,4440 r90 top
R160 "120" R0603 -8894,4440 r90 top
R161 "4.7K" R0603 -9154,4440 r90 top
R162 "470" R0603 -10824,4440 r90 top
R163 "10K" R0603 -10544,4440 r90 top
R164 "5.1" R0603 -14759,4440 r90 top
R165 "5.1" R0603 -14479,4440 r90 top
R166 "5.1" R0603 -14199,4440 r90 top
R167 "5.1" R0603 -13919,4440 r90 top
R168 "5.1" R0603 -13639,4440 r90 top
R169 "5.1" R0603 -13359,4440 r90 top
R170 "5.1" R0603 -18259,4440 r90 top
R171 "5.1" R0603 -17979,4440 r90 top
R172 "5.1" R0603 -17719,4440 r90 top
R173 "5.1" R0603 -17439,4440 r90 top
R174 "5.1" R0603 -17159,4440 r90 top
R175 "5.1" R0603 -16879,4440 r90 top
R176 "10K" R0603 -4554,5135 r90 top
R177 "10K" R0603 -6164,5135 r90 top
R178 "10K" R0603 -5884,5135 r90 top
R179 "10K" R0603 -5604,5135 r90 top
R180 "10K" R0603 -5324,5135 r90 top
R181 "10K" R0603 -7604,5135 r90 top
R182 "4.7K" R0603 -8174,5135 r90 top
R183 "120" R0603 -8684,5135 r90 top
R184 "4.7K" R0603 -8964,5135 r90 top
R185 "470" R0603 -10684,5135 r90 top
R186 "10K" R0603 -10404,5135 r90 top
R187 "5.1" R0603 -14694,5135 r90 top
R188 "5.1" R0603 -14414,5135 r90 top
R189 "5.1" R0603 -14134,5135 r90 top
R190 "5.1" R0603 -13854,5135 r90 top
R191 "5.1" R0603 -13574,5135 r90 top
R192 "5.1" R0603 -13314,5135 r90 top
R193 "5.1" R0603 -18259,5135 r90 top
R194 "5.1" R0603 -17979,5135 r90 top
R195 "5.1" R0603 -17699,5135 r90 top
R196 "5.1" R0603 -17419,5135 r90 top
R197 "5.1" R0603 -17139,5135 r90 top
R198 "5.1" R0603 -16859,5135 r90 top
R199 "10K" R0603 -4444,5830 r90 top
R200 "10K" R0603 -6074,5830 r90 top
R201 "10K" R0603 -5784,5830 r90 top
R202 "10K" R0603 -5514,5830 r90 top
R203 "10K" R0603 -5224,5830 r90 top
R204 "10K" R0603 -7554,5830 r90 top
R205 "4.7K" R0603 -8134,5830 r90 top
R206 "120" R0603 -8654,5830 r90 top
R207 "4.7K" R0603 -8944,5830 r90 top
R208 "470" R0603 -10664,5830 r90 top
R209 "10K" R0603 -10374,5830 r90 top
R210 "5.1" R0603 -14684,5830 r90 top
R211 "5.1" R0603 -14404,5830 r90 top
R212 "5.1" R0603 -14144,5830 r90 top
R213 "5.1" R0603 -13864,5830 r90 top
R214 "5.1" R0603 -13584,5830 r90 top
R215 "5.1" R0603 -13304,5830 r90 top
R216 "5.1" R0603 -18259,5830 r90 top
R217 "5.1" R0603 -17979,5830 r90 top
R218 "5.1" R0603 -17699,5830 r90 top
R219 "5.1" R0603 -17419,5830 r90 top
R220 "5.1" R0603 -17139,5830 r90 top
R221 "5.1" R0603 -16849,5830 r90 top
RS1 "22" NC06-4#1 -1867.84,999.39 r270 top
RS1_1 "22" NC06-4#2 -1163.4,-1049.4 r90 top (schematic designator RS1)
RS2 "22" NC06-4#1 -1827.84,562.39 r270 top
RS2_1 "22" NC06-4#2 -1163.4,-912.9 r90 top (schematic designator RS2)
RS3 "22" NC06-4#1 -1841.84,782.9 r270 top
RS3_1 "22" NC06-4#2 -1163.4,-776.4 r90 top (schematic designator RS3)
RS4 "22" NC06-4#1 14835,65 r0 top
RS5 "22" NC06-4#1 14410,65 r0 top
RS6 "22" NC06-4#1 13950,65 r0 top
RS7 "22" NC06-4#1 15975,955 r0 top
RS8 "22" NC06-4#1 15550,955 r0 top
RS9 "22" NC06-4#1 15090,955 r0 top
RS10 "22" NC06-4#1 17150,1770 r90 top
RS11 "22" NC06-4#1 16670,1845 r0 top
RS12 "22" NC06-4#1 16135,1770 r90 top
S5 "SW DIP-6" DIP_SW_6WAY_SMD -5982,973 r0 top
S6 "SW DIP-6" DIP_SW_6WAY_SMD -7344,4295 r0 top
S7 "SW DIP-6" DIP_SW_6WAY_SMD -7134,4990 r0 top
S8 "SW DIP-6" DIP_SW_6WAY_SMD -7054,5685 r0 top
SUSP10 "VLMO1300-GS08" LEDC1608X80M 13800,5880 r90 top
SW10 "EVQ-5PN04K" SW_EVQ-5PN04K 5410,5870 r0 top
TP9 "TP_YEL" KEYSTONE_5000 22830,3350 r90 top
TP10 "TEST POINT" TP25C50 21915,3480 r90 top
TP11 "TP_YEL" KEYSTONE_5000 22245,3350 r90 top
TP12 "TEST POINT" TP25C50 22500,3480 r90 top
TP13 "TP_YEL" KEYSTONE_5000 9745,3350 r90 top
TP14 "TEST POINT" TP25C50 9415,3480 r90 top
TP15 "TEST POINT" TP25C50 8405,3480 r90 top
TP16 "TP_YEL" KEYSTONE_5000 8735,3350 r90 top
TP17 "TP_RED" KEYSTONE_5000 28870,4600 r90 top
TP18 "TP_YEL" KEYSTONE_5000 21130,5850 r90 top
TP19 "TP_YEL" KEYSTONE_5000 16530,5850 r90 top
TP20 "TP_YEL" KEYSTONE_5000 11035,5850 r90 top
TP21 "TP_RED" KEYSTONE_5000 3210,6410 r90 top
TP22 "TP_YEL" KEYSTONE_5000 1780,6410 r90 top
TVS9 "5V/350W" SOD2513X120M 36760,2580 r0 top
U1 "FX3_121_BUMP_0" 121_BGA_FX3 -828,788.51 r0 top
U2 "M24M02-DRMN6TP" SOIC127P600X175-8N -761,193 r0 top
U3 "ATSHA204-MAH-DA-T" UDFN -345,-3100 r0 top
U4 "FX3_121_BUMP_0" 121_BGA_FX3 16495,-165 r0 top
U5 "M24M02-DRMN6TP" SOIC127P600X175-8N 10655,-25 r0 top
U6 "ATSHA204-MAH-DA-T" UDFN 4010,45 r0 top
U7 "FX3_121_BUMP_0" 121_BGA_FX3 17655,725 r0 top
U8 "M24M02-DRMN6TP" SOIC127P600X175-8N 11625,865 r0 top
U9 "ATSHA204-MAH-DA-T" UDFN 4360,935 r0 top
U10 "FX3_121_BUMP_0" 121_BGA_FX3 18905,1615 r0 top
U11 "M24M02-DRMN6TP" SOIC127P600X175-8N 12325,1755 r0 top
U12 "ATSHA204-MAH-DA-T" UDFN 4430,1825 r0 top
U13 "CYUSB3314-88LTXC" QFN40P1000X1000X100-89M 0,0 r0 top locked
U14 "TPS2560DRC" SON50P300X300X100-11M 28480,2480 r90 top
U15 "TPS2560DRC" SON50P300X300X100-11M 13185,3320 r90 top
U16 "TPD2EUSB30ADRTR" SOTFL35P100X50-3M 21405,5810 r90 top
U17 "TPD2EUSB30ADRTR" SOTFL35P100X50-3M 21670,5810 r90 top
U18 "TPD2EUSB30ADRTR" SOTFL35P100X50-3M 21935,5810 r90 top
U19 "24LC128-I/SM" SOIC127P790X203-8M 14285,5840 r0 top
U20 "NCP361SNT1G" SOP95P275X110-5M 3555,6385 r90 top
U21 "LM1117-5V" SOT-223 7315,9730 r0 top
U22 "AOZ1021AI" SOIC127P600X175-8M 6370,9735 r90 top
U23 "SC189CSKTRT" SOT95P280X145-5M 3075,9765 r90 top
U24 "ATMEGA328" TQFP32-08 -3032,968 r0 top
U25 "MAX485CSA" SOIC-8 -8352,1048 r0 top
U26 "AL5802" SOT26 -12234,297 r0 top
U27 "AL5802" SOT26 -12004,297 r0 top
U28 "AL5802" SOT26 -11774,297 r0 top
U29 "AL5802" SOT26 -11544,297 r0 top
U30 "AL5802" SOT26 -11314,297 r0 top
U31 "AL5802" SOT26 -11084,297 r0 top
U32 "AL5802" SOT26 -15083,204 r0 top
U33 "AL5802" SOT26 -14853,204 r0 top
U34 "AL5802" SOT26 -14623,204 r0 top
U35 "AL5802" SOT26 -14393,204 r0 top
U36 "AL5802" SOT26 -14163,204 r0 top
U37 "AL5802" SOT26 -13933,204 r0 top
U38 "ATMEGA328" TQFP32-08 -4324,4290 r0 top
U39 "MAX485CSA" SOIC-8 -9674,4370 r0 top
U40 "AL5802" SOT26 -13019,4420 r0 top
U41 "AL5802" SOT26 -12789,4420 r0 top
U42 "AL5802" SOT26 -12569,4420 r0 top
U43 "AL5802" SOT26 -12339,4420 r0 top
U44 "AL5802" SOT26 -12109,4420 r0 top
U45 "AL5802" SOT26 -11879,4420 r0 top
U46 "AL5802" SOT26 -16539,4420 r0 top
U47 "AL5802" SOT26 -16309,4420 r0 top
U48 "AL5802" SOT26 -16079,4420 r0 top
U49 "AL5802" SOT26 -15849,4420 r0 top
U50 "AL5802" SOT26 -15619,4420 r0 top
U51 "AL5802" SOT26 -15389,4420 r0 top
U52 "ATMEGA328" TQFP32-08 -4104,4985 r0 top
U53 "MAX485CSA" SOIC-8 -9479,5065 r0 top
U54 "AL5802" SOT26 -12974,5115 r0 top
U55 "AL5802" SOT26 -12744,5115 r0 top
U56 "AL5802" SOT26 -12514,5115 r0 top
U57 "AL5802" SOT26 -12284,5115 r0 top
U58 "AL5802" SOT26 -12054,5115 r0 top
U59 "AL5802" SOT26 -11824,5115 r0 top
U60 "AL5802" SOT26 -16519,5115 r0 top
U61 "AL5802" SOT26 -16289,5115 r0 top
U62 "AL5802" SOT26 -16069,5115 r0 top
U63 "AL5802" SOT26 -15839,5115 r0 top
U64 "AL5802" SOT26 -15609,5115 r0 top
U65 "AL5802" SOT26 -15379,5115 r0 top
U66 "ATMEGA328" TQFP32-08 -3994,5680 r0 top
U67 "MAX485CSA" SOIC-8 -9439,5760 r0 top
U68 "AL5802" SOT26 -12959,5810 r0 top
U69 "AL5802" SOT26 -12729,5810 r0 top
U70 "AL5802" SOT26 -12499,5810 r0 top
U71 "AL5802" SOT26 -12269,5810 r0 top
U72 "AL5802" SOT26 -12054,5810 r0 top
U73 "AL5802" SOT26 -11824,5810 r0 top
U74 "AL5802" SOT26 -16519,5810 r0 top
U75 "AL5802" SOT26 -16289,5810 r0 top
U76 "AL5802" SOT26 -16059,5810 r0 top
U77 "AL5802" SOT26 -15829,5810 r0 top
U78 "AL5802" SOT26 -15599,5810 r0 top
U79 "AL5802" SOT26 -15369,5810 r0 top
V1 "Red" LED0805S 10630,-3065 r0 top
V2 "Red" LED0805S 16125,80 r0 top
V3 "Red" LED0805S 17285,970 r0 top
V4 "Red" LED0805S 18535,1860 r0 top
Y1 "19.2MHZ" "爱普生晶振3.2×2.5MM - 无源" -793.31,1187.5 r0 top
Y1_1 "19.2MHZ" "爱普生晶振3.2×2.5MM - 无源" -369.4,-662.4 r270 top (schematic designator Y1)
Y2 "19.2MHZ" "爱普生晶振3.2×2.5MM - 无源" 14695,50 r0 top
Y3 "19.2MHZ" "爱普生晶振3.2×2.5MM - 无源" 15835,940 r0 top
Y4 "19.2MHZ" "爱普生晶振3.2×2.5MM - 无源" 16980,1830 r0 top
Y5 "16MHz" RESONATOR-SMD -3637,1128 r0 top
Y6 "16MHz" RESONATOR-SMD -4929,4450 r0 top
Y7 "16MHz" RESONATOR-SMD -4709,5145 r0 top
Y8 "16MHz" RESONATOR-SMD -4599,5840 r0 top
Y10 "NX3225SA-26.000000MHZ-G4" OSCCC250X320X70-4M 8295,5750 r90 top

## Footprints (in the part's own frame and the unit in brackets; to place one, negate y for a bottom-side part, rotate by r counter-clockwise, add the part's x,y. Pads: shape width x height; smd on the part's side, far side on the other; paste and mask are expansions set on the pad)
121_BGA_FX3 [mil] "FX3_121_BUMP"
  round 9.85 smd: A1(-157.45,157.45) A2(-125.96,157.45) A3(-94.47,157.45) A4(-62.98,157.45) A5(-31.49,157.45) A6(0,157.45) A7(31.49,157.45) A8(62.98,157.45) A9(94.47,157.45) A10(125.96,157.45) A11(157.45,157.45) B1(-157.45,125.96) B2(-125.96,125.96) B3(-94.47,125.96) B4(-62.98,125.96) B5(-31.49,125.96) B6(0,125.96) B7(31.49,125.96) B8(62.98,125.96) B9(94.47,125.96) B10(125.96,125.96) B11(157.45,125.96) C1(-157.45,94.47) C2(-125.96,94.47) C3(-94.47,94.47) C4(-62.98,94.47) C5(-31.49,94.47) C6(0,94.47) C7(31.49,94.47) C8(62.98,94.47) C9(94.47,94.47) C10(125.96,94.47) C11(157.45,94.47) D1(-157.45,62.98) D2(-125.96,62.98) D3(-94.47,62.98) D4(-62.98,62.98) D5(-31.49,62.98) D6(0,62.98) D7(31.49,62.98) D8(62.98,62.98) D9(94.47,62.98) D10(125.96,62.98) D11(157.45,62.98) E1(-157.45,31.49) E2(-125.96,31.49) E3(-94.47,31.49) E4(-62.98,31.49) E5(-31.49,31.49) E6(0,31.49) E7(31.49,31.49) E8(62.98,31.49) E9(94.47,31.49) E10(125.96,31.49) E11(157.45,31.49) F1(-157.45,0) F2(-125.96,0) F3(-94.47,0) F4(-62.98,0) F5(-31.49,0) F6(0,0) F7(31.49,0) F8(62.98,0) F9(94.47,0) F10(125.96,0) F11(157.45,0) G1(-157.45,-31.49) G2(-125.96,-31.49) G3(-94.47,-31.49) G4(-62.98,-31.49) G5(-31.49,-31.49) G6(0,-31.49) G7(31.49,-31.49) G8(62.98,-31.49) G9(94.47,-31.49) G10(125.96,-31.49) G11(157.45,-31.49) H1(-157.45,-62.98) H2(-125.96,-62.98) H3(-94.47,-62.98) H4(-62.98,-62.98) H5(-31.49,-62.98) H6(0,-62.98) H7(31.49,-62.98) H8(62.98,-62.98) H9(94.47,-62.98) H10(125.96,-62.98) H11(157.45,-62.98) J1(-157.45,-94.47) J2(-125.96,-94.47) J3(-94.47,-94.47) J4(-62.98,-94.47) J5(-31.49,-94.47) J6(0,-94.47) J7(31.49,-94.47) J8(62.98,-94.47) J9(94.47,-94.47) J10(125.96,-94.47) J11(157.45,-94.47) K1(-157.45,-125.96) K2(-125.96,-125.96) K3(-94.47,-125.96) K4(-62.98,-125.96) K5(-31.49,-125.96) K6(0,-125.96) K7(31.49,-125.96) K8(62.98,-125.96) K9(94.47,-125.96) K10(125.96,-125.96) K11(157.45,-125.96) L1(-157.45,-157.45) L2(-125.96,-157.45) L3(-94.47,-157.45) L4(-62.98,-157.45) L5(-31.49,-157.45) L6(0,-157.45) L7(31.49,-157.45) L8(62.98,-157.45) L9(94.47,-157.45) L10(125.96,-157.45) L11(157.45,-157.45)
  silkscreen extent -247,-247 247,250
157SW [mil] "157SW"
  rect 40x78 smd: 1(0,0) 2(-157.5,0)
  silkscreen extent -120,-50 -40,50
0603S-CAP [mm]
  rect 0.7x0.9 smd: 1(-0.65,0) 2(0.65,0)
  silkscreen extent -1.31,-0.67 1.31,0.67
0603S-RES [mm]
  rect 0.7x0.9 smd: 1(-0.65,0) 2(0.65,0)
  silkscreen extent -1.12,-0.64 1.12,0.64
C0402 [mil]
  rect 24x23 smd: 1(-20,0) 2(20,0)
  silkscreen extent -37,-16 37,16, body extent -20,-10 19,10, height 20
C0603 [mm]
  rect 0.7x0.9 smd: 1(0.65,0) 2(-0.65,0)
  silkscreen extent -1.31,-0.67 1.31,0.67
C0805S-CAP [mm]
  rect 1.1x1 smd: 1(0.838,0) 2(-0.838,0)
  silkscreen extent -1.68,-0.66 1.68,0.66
CAPAE660X800M [mm]
  rect 3.8x1.8 smd mask+0: 1(-2.2,0) 2(2.2,0)
  silkscreen extent -5.5,-3.4 3.4,3.4, body extent -3.4,-3.4 3.4,3.4, height 8
CAPC1005X55M [mm]
  rect 0.8x0.7 smd mask+0: 1(-0.8,0) 2(0.8,0)
  Top Layer keep-out region: -0.375,-0.275 0.375,-0.275 0.375,0.275 -0.375,0.275
  silkscreen extent -0.53,-0.58 0.53,0.58, body extent -0.53,-0.28 0.53,0.27, height 0.55
CAPC1005X56M [mm]
  rect 1.1x0.7 smd mask+0: 1(-0.65,0) 2(0.65,0)
  silkscreen extent -0.55,-0.58 0.55,0.58, body extent -0.55,-0.3 0.55,0.3, height 0.56
CAPC1608X90M [mm]
  rect 1.2x1 smd mask+0: 1(-0.9,0) 2(0.9,0)
  silkscreen extent -0.85,-0.72 0.85,0.72, body extent -0.85,-0.45 0.85,0.45, height 0.9
CAPC2012X145M [mm]
  rect 1x1.6 smd mask+0: 1(-1.25,0) 2(1.25,0)
  Top Layer keep-out region: -0.7,-0.725 0.7,-0.725 0.7,0.725 -0.7,0.725
  silkscreen extent -1.1,-1.02 1.1,1.02, body extent -1.1,-0.72 1.1,0.72, height 1.45
CAPC2112X70M [mm] "Chip Capacitor, 2-Leads, Body 2.0x1.3mm, IPC Low Density"
  rect 1.55x1.6 smd paste+0 mask+0: 1(-0.975,0)
  rect 1.55x1.6 smd mask+0: 2(0.975,0)
  silkscreen extent -1.1,-1.02 1.1,1.02, body extent -1.1,-0.72 1.1,0.72, height 0.7
CAPC3216X100M [mm]
  rect 1.5x1.95 smd mask+0: 1(-1.55,0) 2(1.55,0)
  Top Layer keep-out region: -0.7,-0.9 0.7,-0.9 0.7,0.9 -0.7,0.9
  silkscreen extent -1.7,-1.2 1.7,1.2, body extent -1.7,-0.9 1.7,0.9, height 1
CAPCP3216X100M [mm]
  rect 1.85x1.95 smd mask+0: 1(-1.425,0) 2(1.425,0)
  Top Layer keep-out region: -0.4,-0.9 0.4,-0.9 0.4,0.9 -0.4,0.9
  silkscreen extent -1.7,-1.2 1.7,1.2, body extent -1.7,-0.9 1.7,0.9, height 1
DIP_SW_6WAY_SMD [mm] "DIP Switch; 16 Leads"
  rect 0.76x1.27 smd: 1(-3.175,-3.81) 2(-1.905,-3.81) 3(-0.635,-3.81) 4(0.635,-3.81) 5(1.905,-3.81) 6(3.175,-3.81) 7(3.175,3.81) 8(1.905,3.81) 9(0.635,3.81) 10(-0.635,3.81) 11(-1.905,3.81) 12(-3.175,3.81)
  silkscreen extent -4.6,-2.7 4.6,2.7
FH12-30S-0.5SH [mm] "Connector; FH12 Series; 20 Position; 0.5mm Spaced Bottom Contact"
  rect 0.3x1.25 smd: 1(-7.25,-1.162) 2(-6.75,-1.162) 3(-6.25,-1.162) 4(-5.75,-1.162) 5(-5.25,-1.162) 6(-4.75,-1.162) 7(-4.25,-1.162) 8(-3.75,-1.162) 9(-3.25,-1.162) 10(-2.75,-1.162) 11(-2.25,-1.162) 12(-1.75,-1.162) 13(-1.25,-1.162) 14(-0.75,-1.162) 15(-0.25,-1.162) 16(0.25,-1.162) 17(0.75,-1.162) 18(1.25,-1.162) 19(1.75,-1.162) 20(2.25,-1.162) 21(2.75,-1.162) 22(3.25,-1.162) 23(3.75,-1.162) 24(4.25,-1.162) 25(4.75,-1.162) 26(5.25,-1.162) 27(5.75,-1.162) 28(6.25,-1.162) 29(6.75,-1.162) 30(7.25,-1.162)
  rect 2x3 smd: 31(-8.79,1.163) 31(8.79,1.163)
  silkscreen extent -10.35,-2.31 10.35,4.11
FOXCONN_UEA1112C-4HK1-4H [mm]
  rect 1.4x1.4 hole 0.7 mask+0: 1(0,0)
  round 1.4 hole 0.7 mask+0: 2(2.5,0) 3(4.5,0) 4(7,0) 5(7.5,1.5) 6(5.5,1.5) 7(3.5,1.5) 8(1.5,1.5) 9(-0.5,1.5)
  round 3 hole 2.3 mask+0: 10(-3.07,-2) 11(10.07,-2)
  silkscreen extent -4.62,-13.78 10.9,2.72, body extent -3.92,-13.8 10.92,2.74, height 6.99
FOXCONN_UEB1112C-2AK1-4H [mm]
  rect 1.62x1.62 hole 0.92 mask+0: 1(1.25,5.353)
  round 1.62 hole 0.92 mask+0: 2(-1.25,5.353) 3(-1.25,3.353) 4(1.25,3.353)
  round 1.4 hole 0.7 mask+0: 5(-4.25,7.353) 6(-2.5,7.353) 7(0,7.353) 8(2.5,7.353) 9(4.25,7.353)
  round 3 hole 2.3 mask+0: 10(6.02,0.643) 11(-6.02,0.643)
  silkscreen extent -6,-9.66 6.73,8.69, body extent -6,-9.66 6,8.69, height 12.9
HDR1X2 [mm] "Connector; Header; 2 Position"
  rect 1.5x1.5 hole 0.9: 1(0,0)
  round 1.5 hole 0.9: 2(2.54,0)
  silkscreen extent -1.27,-1.27 3.81,1.27
IND_NR6028T4R7M [mm]
  rect 1.6x5.7 smd mask+0: 1(-2.35,0) 2(2.35,0)
  Top Layer keep-out region: -1.4,-3.1 1.4,-3.1 1.4,3.1 -1.4,3.1
  silkscreen extent -3.1,-3.13 3.1,3.13, body extent -3.12,-3.12 3.12,3.12, height 2.8
INDC2012X105M [mm] "Chip Resistor, 2-Leads, Body 2.0x1.3mm, IPC Low Density"
  rect 1.5x1.55 smd mask+0: 1(-1,0) 2(1,0)
  silkscreen extent -1.1,-1 1.1,1, body extent -1.1,-0.72 1.1,0.72, height 1.05
INDP3225X240M [mm]
  rect 1.6x2.05 smd mask+0: 1(-1.625,0) 2(1.625,0)
  Top Layer keep-out region: -0.8,-1.4 0.8,-1.4 0.8,1.35 -0.8,1.35
  silkscreen extent -1.65,-1.4 1.65,1.4, body extent -1.6,-1.35 1.6,1.35, height 2.4
KEYSTONE_5000 [mm]
  round 1.7 hole 1 mask+0: 1(0,0)
  silkscreen extent -1.2,-1.2 1.2,1.2, body extent -0.91,-0.91 0.91,0.91, height 4.57
L0603 [mm]
  rect 0.7x0.9 smd: 1(-0.65,0) 2(0.65,0)
  silkscreen extent -1.31,-0.67 1.31,0.67
LED0805 [mm]
  rect 1.1x1 smd: 1(0.838,0) 2(-0.838,0)
  silkscreen extent -0.18,-0.3 0.2,0.3
LED0805S [mm]
  rect 1.2x1.2 smd: 1(-1.05,0) 2(1.05,0)
  silkscreen extent -0.27,-0.64 0.36,0.63, body extent -0.98,-0.46 1.08,0.45, height 0.85
LEDC1608X35M [mm]
  rect 1.05x1 smd mask+0: 1(-0.95,0) 2(0.95,0)
  Top Layer keep-out region: -0.4,-0.4 0.4,-0.4 0.4,0.4 -0.4,0.4
  silkscreen extent -0.8,-0.65 0.8,1.5, body extent -0.8,-0.4 0.8,0.4, height 0.35
LEDC1608X80M [mm]
  rect 1.1x1 smd mask+0: 1(-0.95,0) 2(0.95,0)
  Top Layer keep-out region: -0.3,-0.4 0.3,-0.4 0.3,0.4 -0.3,0.4
  silkscreen extent -0.8,-0.72 1.1,2.1, body extent -0.8,-0.4 0.8,0.4, height 0.8
MHDR1X6 [mm] "Connector; Header; 6 Position"
  rect 1x1 hole 0.6: 1(0,0)
  round 1 hole 0.6: 2(1.27,0) 3(2.54,0) 4(3.81,0) 5(5.08,0) 6(6.35,0)
NC06-4#1 [mil]
  rect 18x36 smd: 1(0.4,-0.16) 2(31.9,-0.16) 3(63.39,-0.16) 4(94.4,-0.16) 5(94.4,-61.16) 6(63.39,-61.16) 7(31.9,-61.16) 8(0.4,-61.16)
  silkscreen extent -16,-38 111,40
NC06-4#2 [mil]
  rect 18x36 smd: 1(0.4,0.16) 2(31.9,0.16) 3(63.39,0.16) 4(94.4,0.16) 5(94.4,61.16) 6(63.39,61.16) 7(31.9,61.16) 8(0.4,61.16)
  silkscreen extent -16,-40 111,38